# Altium PCB CAN_IB_V1.PcbDoc
Units mm, origin at the board's own origin, x right, y up, seen from the top; angles counter-clockwise.
Board outline 38.5 x 38.25 mm, 2 copper layers (Top Layer, Bottom Layer); 31 components, 50 nets, 183 pads, 22 vias.
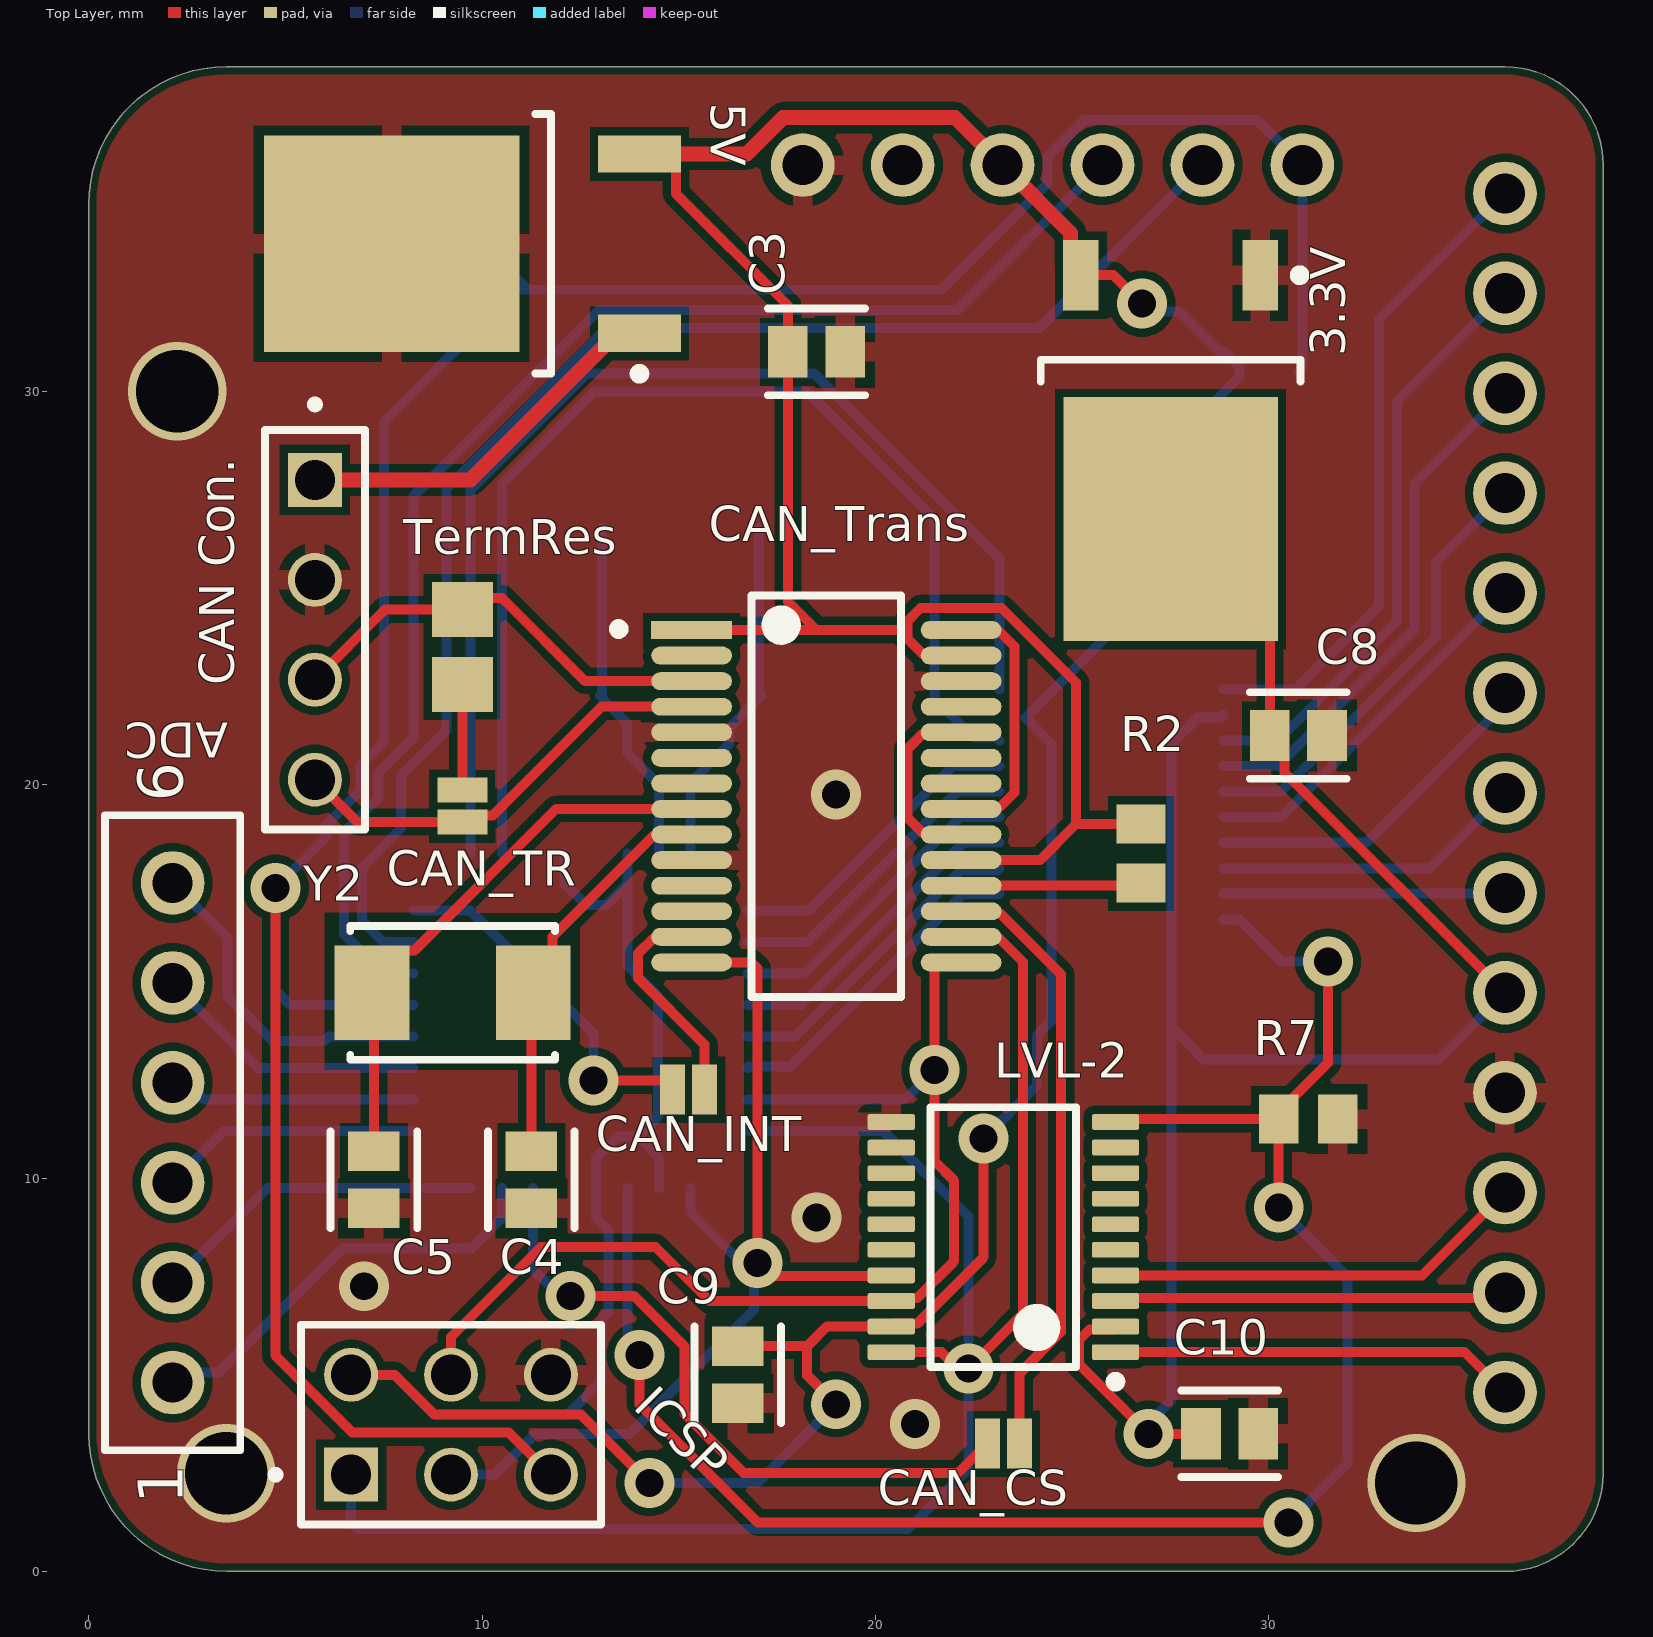
[diagram p0: Top Layer view]
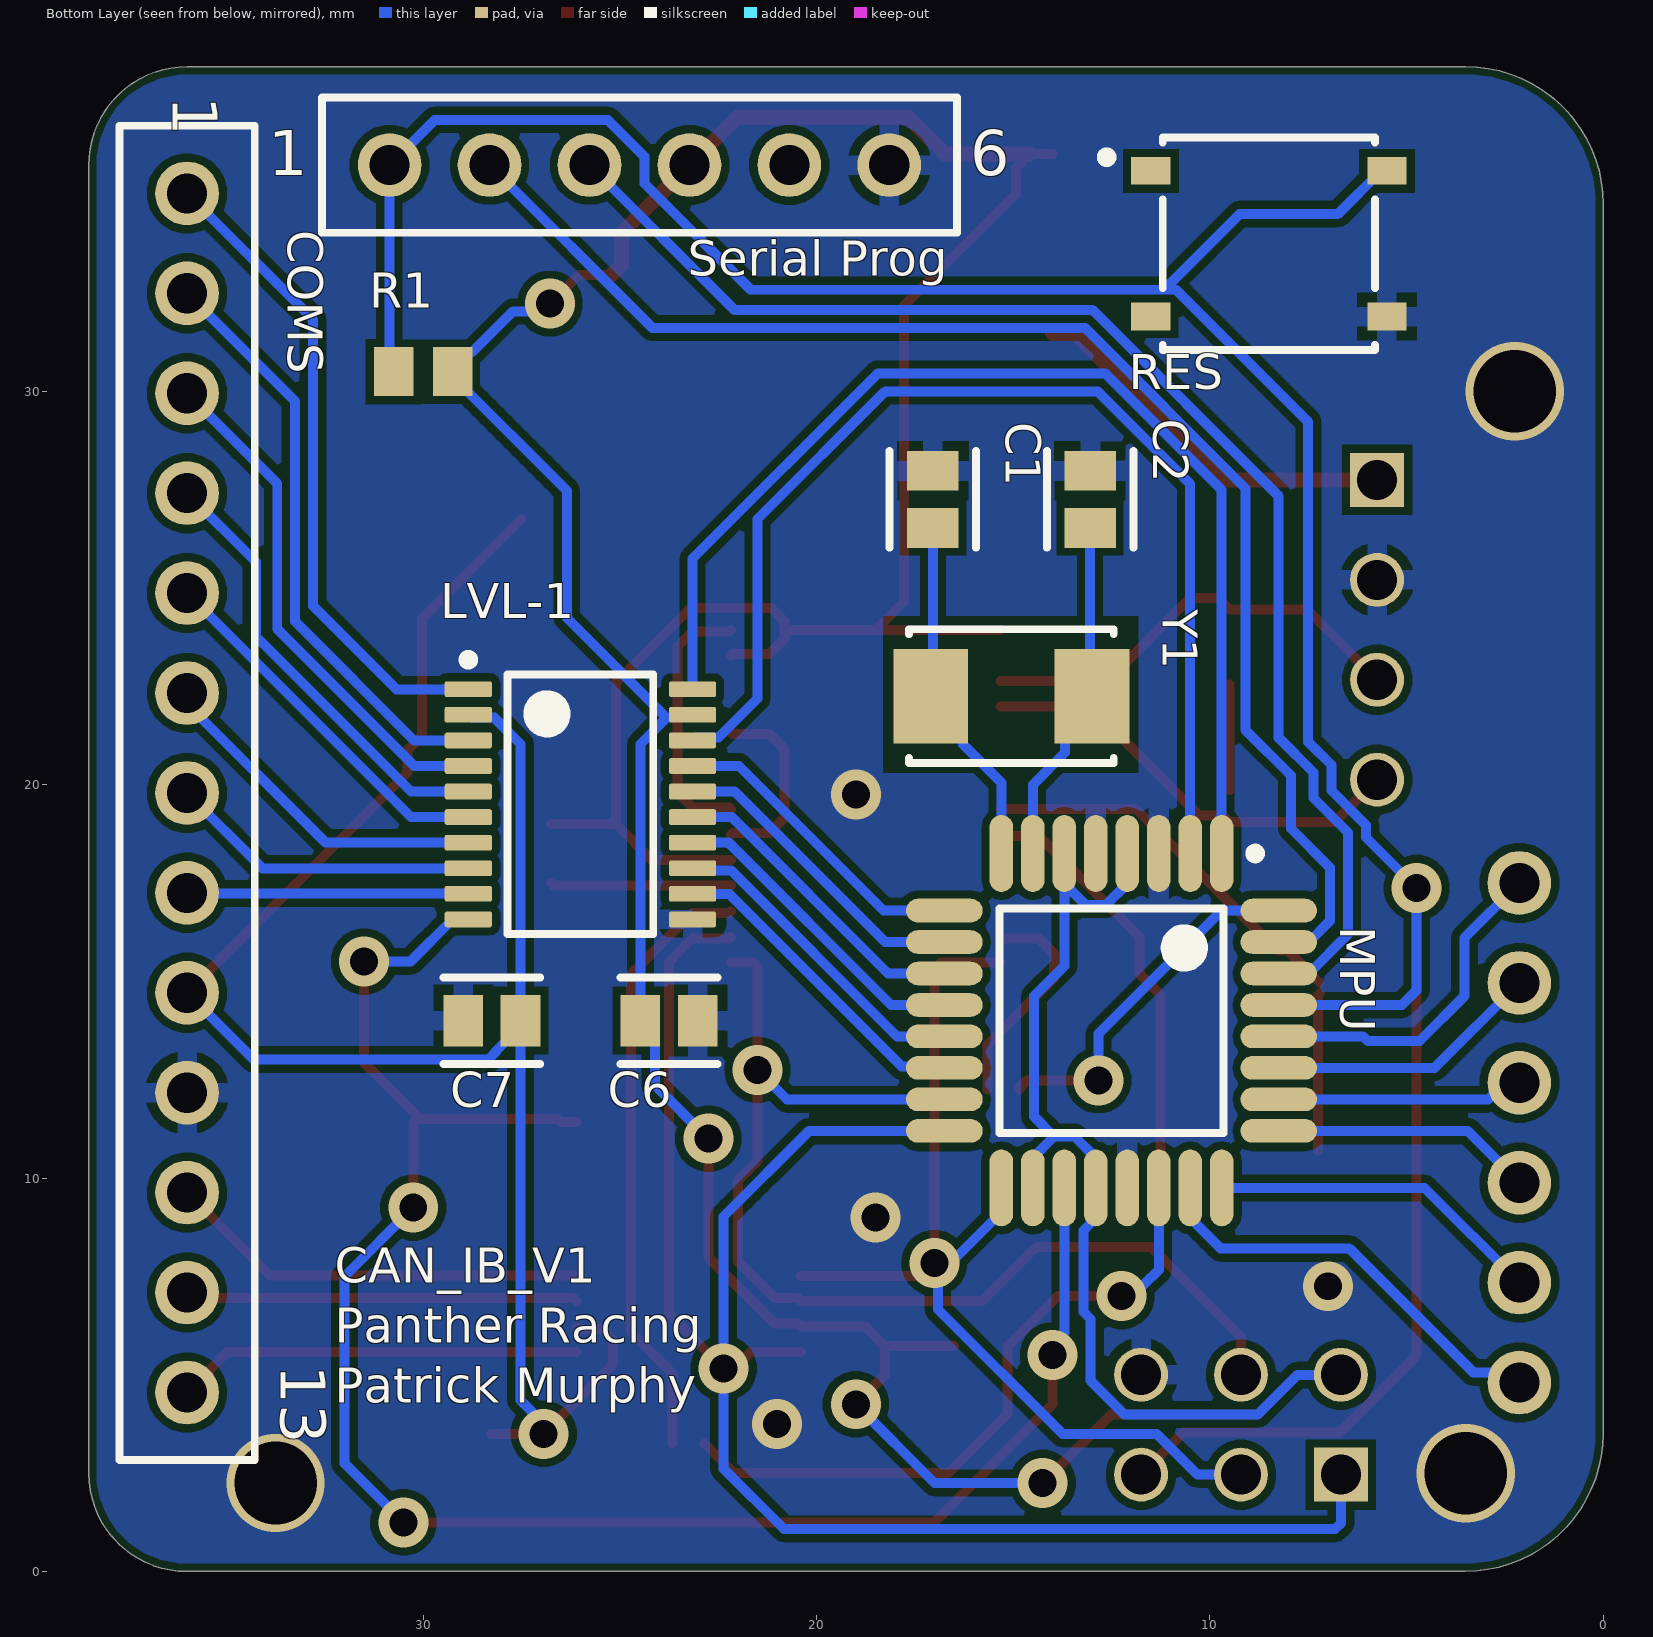
[diagram p1: Bottom Layer view, seen from below]
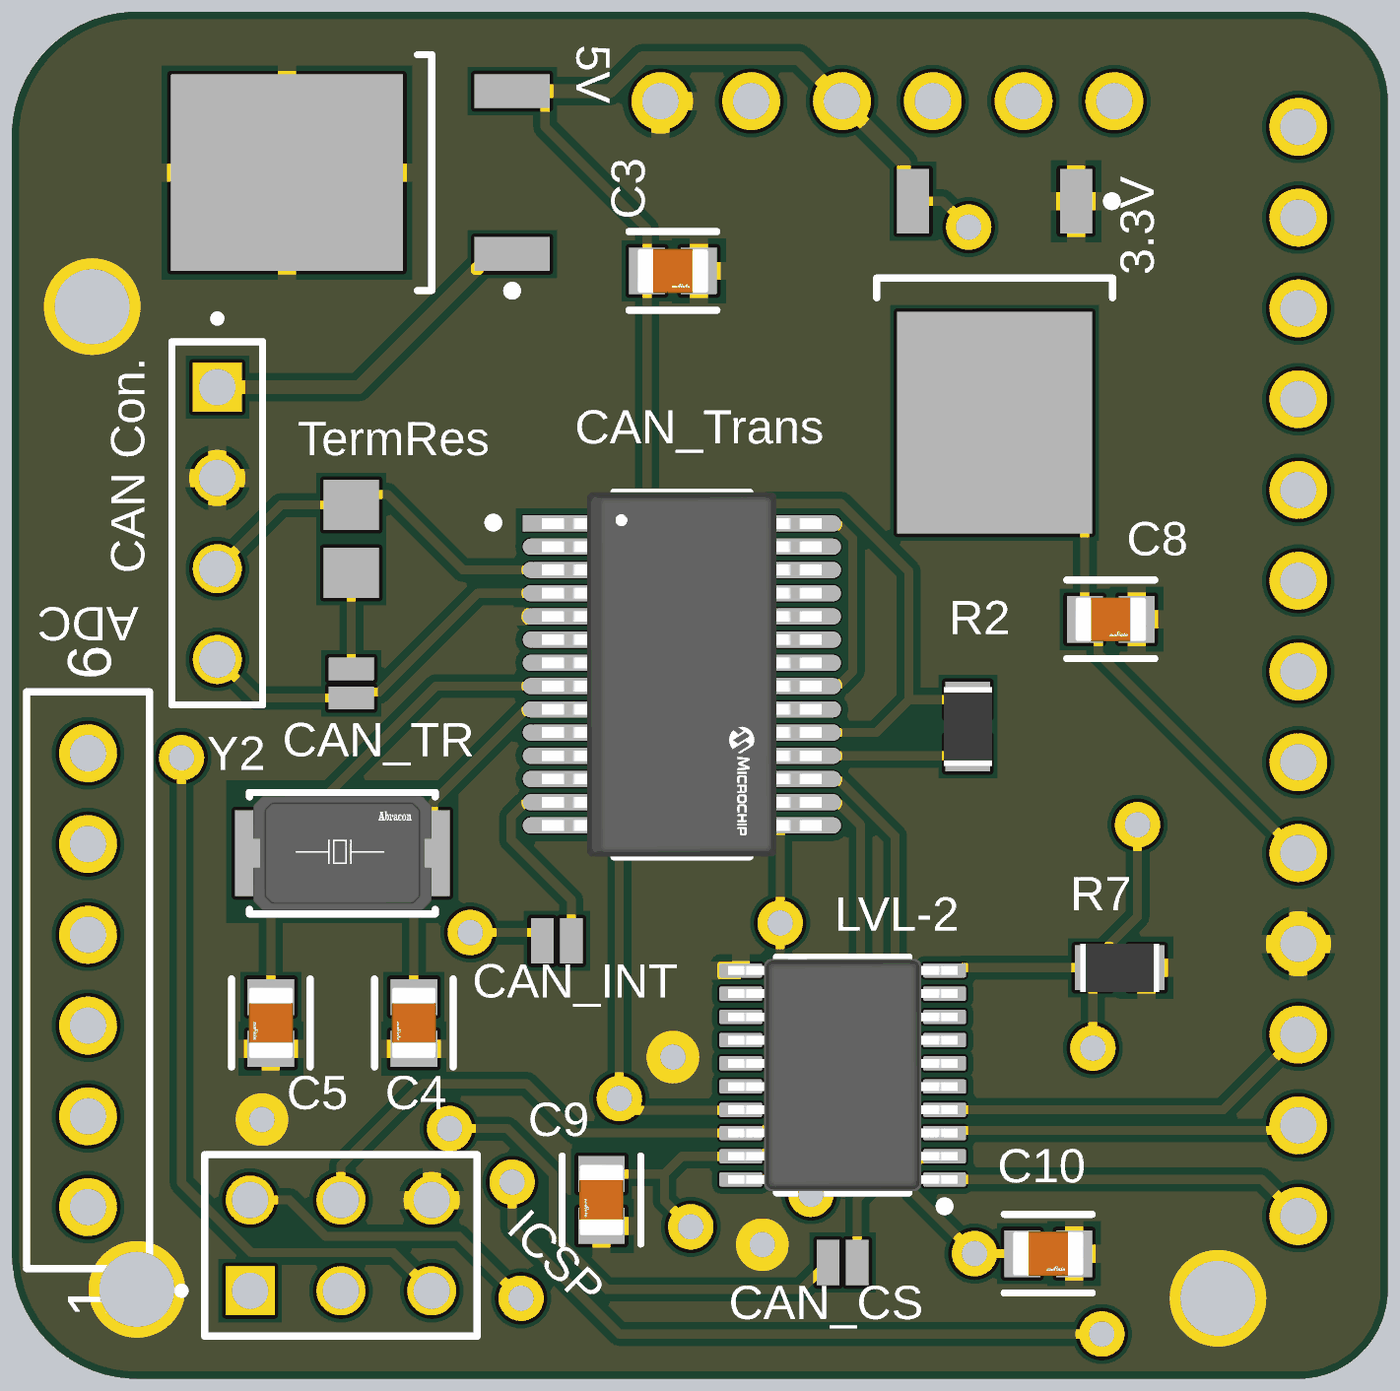
[diagram p2: 3D render of the assembled board from above, using the file's embedded part models]
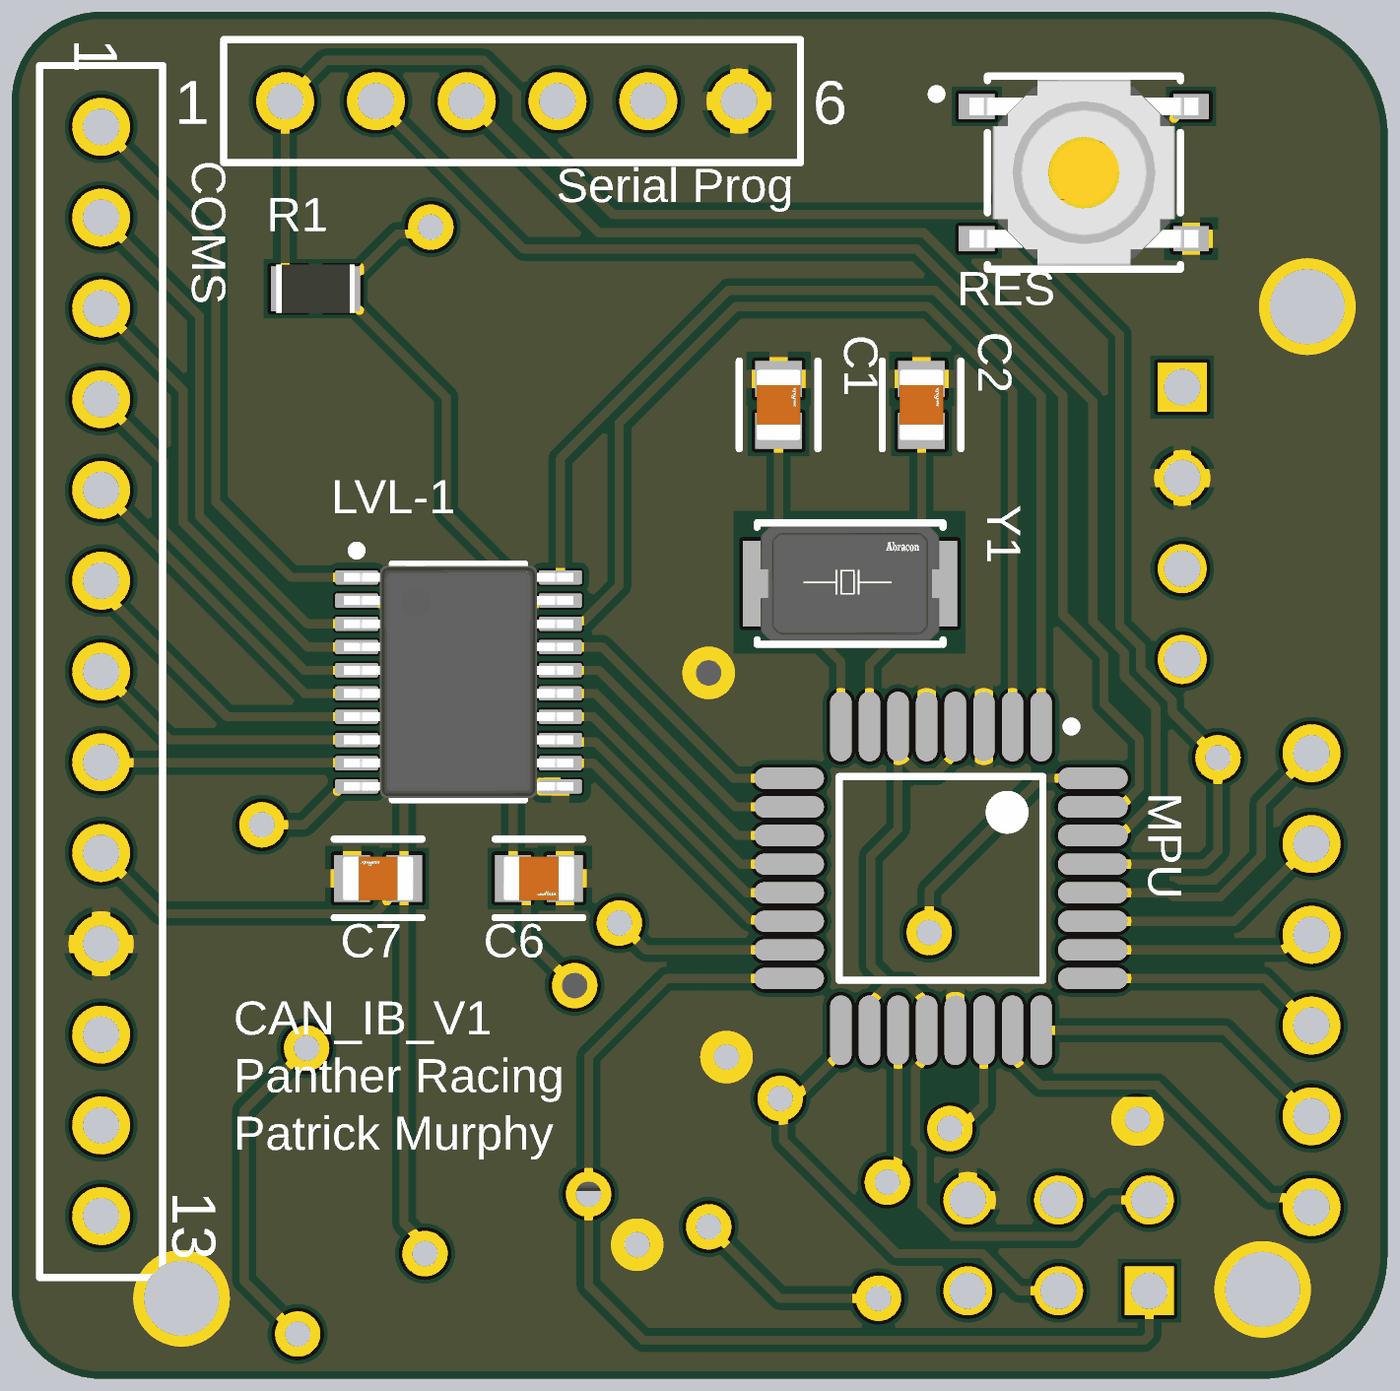
[diagram p3: 3D render of the assembled board from below, using the file's embedded part models]

## Layer stack, top to bottom
Top Solder: solder mask 0.0102, Solder Resist, Dk 3.5
Top Layer: signal copper 0.0356
Dielectric 1: dielectric 0.32, FR-4, Dk 4.8
Bottom Layer: signal copper 0.0356
Bottom Solder: solder mask 0.0102, Solder Resist, Dk 3.5

## Board outline
0.007,3.503 0.007,34.75 0,34.75 cw(c3.5,34.75) 3.5,38.25 36,38.25 cw(c36,35.75) 38.5,35.75 38.5,2.5 cw(c36,2.5) 36,0 3.507,0 3.507,0.003 cw(c3.507,3.503)

## Design rules (kind name [scope] priority, off if disabled: settings)
BoardOutlineClearance [All] p1: gap=0.2 ignorepadtopadclearanceinfootprint=FALSE except(0.4: Arc-SplitBarrior Arc-SplitContinuation Track-SplitBarrior Track-SplitContinuation SMDPad-SplitBarrior SMDPad-SplitContinuation THPad-SplitBarrior THPad-SplitContinuation Via-SplitBarrior Via-SplitContinuation Fill-SplitBarrior Fill-SplitContinuation Poly-SplitBarrior Poly-SplitContinuation Region-SplitBarrior Region-SplitContinuation Text-SplitBarrior Text-SplitContinuation)
Clearance "Clearance Bottom Layer" [OnLayer('Bottom Layer')] p1: gap=0.203 ignorepadtopadclearanceinfootprint=TRUE except(0.254: Arc-Text Track-Text SMDPad-Text THPad-Text Via-Text Fill-Text Poly-Text Region-Text Text-Text)
Clearance "Clearance Top Layer" [OnLayer('Top Layer')] p2: gap=0.203 ignorepadtopadclearanceinfootprint=TRUE except(0.254: Arc-Text Track-Text SMDPad-Text THPad-Text Via-Text Fill-Text Poly-Text Region-Text Text-Text)
Clearance [All] p3: gap=0.2 ignorepadtopadclearanceinfootprint=FALSE except(0.089: Arc-Arc Arc-Track Arc-SMDPad Track-Track Track-SMDPad SMDPad-SMDPad; 0.127: Arc-Via Track-Via SMDPad-Via THPad-Via Via-Via; 0.254: Arc-Text Track-Text SMDPad-Text THPad-Text Via-Text Fill-Text Poly-Text Region-Text Text-Text)
HoleSize [All] p1: absolutevalues=TRUE maxlimit=6.3 minlimit=0.2 maxpercent=80.000 minpercent=20.000
MinimumAnnularRing [All] p1: minimumring=0.076
MinimumSolderMaskSliver [All] p1: minsoldermaskwidth=0.1
PolygonConnect PolygonConnect_1 [All] p1: thpad.connectstyle=Relief thpad.reliefconductorwidth=0.508 thpad.reliefentries=4 thpad.polygonreliefangle="90 Angle" thpad.airgapwidth=0.254 smdpad.connectstyle=Relief smdpad.reliefconductorwidth=0.508 smdpad.reliefentries=4 smdpad.polygonreliefangle="90 Angle" smdpad.airgapwidth=0.254 via.connectstyle=Direct via.reliefconductorwidth=0.508 via.reliefentries=4 via.polygonreliefangle="90 Angle" via.airgapwidth=0.254
RoomDefinition CAN_IB_V1 [InComponentClass('CAN_IB_V1')] p1: confinementstyle=ConfineIn formatcopy=TRUE lockcomponents=FALSE outline 0,38.25 38.25,38.25 38.25,0 0,0
RoutingCorners [All] p1: cornerstyle=Round minsetback=2.54 maxsetback=2.54
RoutingVias [All] p1: holewidth=0.5 width=1 viastyle="Through Hole" minholewidth=0.2 minwidth=0.45 maxholewidth=1 maxwidth=2
SilkToSilkClearance [All] p1: silktosilkclearance=0.1
SilkToSolderMaskClearance [IsPad] p1: minsilkscreentomaskgap=0.1 clearancetoexposedcopper=TRUE
SolderMaskExpansion [All] p1: expansion=0.102 istentingtop=FALSE
Width [All] p1: maxlimit=2.54 minlimit=0.089 preferedwidth=0.254
25 further rules are at their usual default settings.

## Components (designator, comment, footprint, x,y, rotation, side; value= is the part's Value field where it differs from the comment)
3.3V "LD1117ADT33TR" TO-252_L 27.5,28.75 r270 top
5V "L7805CDT-TR" TO-252_N 9.75,33.75 r180 top
ADC "SAMTEC-TSW-106-07-X-SJ" SAMTEC-TSW-106-07-X-S 2.133,11.152 r90 top
C1 "22pf" FP-GRM21B-0_15-IPC_C#1 17.044,27.25 r90 bottom
C2 "22pf" FP-GRM21B-0_15-IPC_C#1 13.044,27.25 r90 bottom
C3 ".1uf" FP-GRM21B-0_15-IPC_C#1 18.5,31 r0 top
C4 "27pf" FP-GRM21B-0_15-IPC_C#2 11.25,9.956 r270 top
C5 "27pf" FP-GRM21B-0_15-IPC_C#2 7.25,9.956 r270 top
C6 ".1uf" FP-GRM21B-0_15-IPC_C#3 23.75,14 r180 bottom
C7 ".1uf" FP-GRM21B-0_15-IPC_C#2 28.25,14 r0 bottom
C8 ".1uf" FP-GRM21B-0_15-IPC_C#1 30.75,21.25 r0 top
C9 ".1uf" FP-GRM21B-0_15-IPC_C#1 16.5,5 r270 top
C10 ".1uf" FP-GRM21B-0_15-IPC_C#1 29,3.5 r0 top
"CAN Con." "TSW-104-07-F-S" SAMTEC_TSW-104-07-F-S 5.75,23.936 r270 top
CAN_CS "" SMT-JUMPER_2_NO_SILK 23.25,3.25 r0 top
CAN_INT "" SMT-JUMPER_2_NO_SILK 15.25,12.25 r0 top
CAN_TR "" SMT-JUMPER_2_NO_SILK 9.5,19.456 r90 top
CAN_Trans "MCP25625T-E/SS" FP-C04-073-IPC_B 18.75,19.706 r0 top
COMS "SAMTEC-TSW-113-07-X-SJ" SAMTEC-TSW-113-07-X-S 36,19.79 r270 bottom
ICSP "TSW-103-07-F-D" SAMTEC_TSW-103-07-F-D 9.21,3.73 r0 top
LVL-1 "TXB0108PWR" PW0020A_L 26,19.5 r180 bottom
LVL-2 "TXB0108PWR" PW0020A_L 23.25,8.5 r180 top
MPU "ATmega328P-AU" 32A_M 12.5,14 r270 bottom
R1 "ERA-6AEB103V" RESC2013X60X40LL20T25_A 30,30.5 r180 bottom
R2 "ERA-6AEB103V" RESC2013X60X40LL20T25_A 26.75,18.25 r90 top
R7 "ERA-6AEB103V" RESC2013X60X40LL20T25_A 31,11.5 r0 top
RES "PTS526SK15SMTR2LFS" FP-PTS526SK15SMTR2LFS-MFG 8.5,33.75 r180 bottom
"Serial Prog" "SAMTEC-TSW-106-07-X-SJ" SAMTEC-TSW-106-07-X-S 24.5,35.75 r180 bottom
TermRes "ERA6AEB121V" RESC2013X60X40ML20T25 9.5,23.5 r270 top
Y1 "ABM3-16.000MHZ-D2Y-T" FP-ABM3-MFG#1 15.044,22.25 r180 bottom
Y2 "ABM3-8.000MHZ-D2Y-T" FP-ABM3-MFG#2 9.25,14.706 r0 top

## Footprints (in the part's own frame and the unit in brackets; to place one, negate y for a bottom-side part, rotate by r counter-clockwise, add the part's x,y. Pads: shape width x height; smd on the part's side, far side on the other; paste and mask are expansions set on the pad)
32A_M [mm] "Thin QFP, 32-Leads, Body 7x7mm, Pitch 0.8mm, IPC Low Density"
  oval 1.95x0.6 smd: 1(-4.25,2.8) 2(-4.25,2) 3(-4.25,1.2) 4(-4.25,0.4) 5(-4.25,-0.4) 6(-4.25,-1.2) 7(-4.25,-2) 8(-4.25,-2.8) 17(4.25,-2.8) 18(4.25,-2) 19(4.25,-1.2) 20(4.25,-0.4) 21(4.25,0.4) 22(4.25,1.2) 23(4.25,2) 24(4.25,2.8)
  oval 0.6x1.95 smd: 9(-2.8,-4.25) 10(-2,-4.25) 11(-1.2,-4.25) 12(-0.4,-4.25) 13(0.4,-4.25) 14(1.2,-4.25) 15(2,-4.25) 16(2.8,-4.25) 25(2.8,4.25) 26(2,4.25) 27(1.2,4.25) 28(0.4,4.25) 29(-0.4,4.25) 30(-1.2,4.25) 31(-2,4.25) 32(-2.8,4.25)
  silkscreen extent -4.37,-2.85 2.85,3.77, body extent -3.5,-3.5 3.5,3.5, height 1.2
FP-ABM3-MFG#1 [mm]
  rect 1.9x2.4 smd paste+0: 1(-2.05,0) 2(2.05,0)
  silkscreen extent -2.6,-1.7 2.6,1.7, body extent -2.5,-1.6 2.5,1.6, height 1.3
FP-ABM3-MFG#2 [mm]
  rect 1.9x2.4 smd: 1(-2.05,0) 2(2.05,0)
  silkscreen extent -2.6,-1.7 2.6,1.7, body extent -3.1,-1.8 3.1,1.8, height 0.25
FP-C04-073-IPC_B [mm]
  rect 2.053x0.455 smd paste+0 mask+0.038: 1(-3.425,4.225)
  rrect100% 2.053x0.455 smd paste+0 mask+0.038: 2(-3.425,3.575) 3(-3.425,2.925) 4(-3.425,2.275) 5(-3.425,1.625) 6(-3.425,0.975) 7(-3.425,0.325) 8(-3.425,-0.325) 9(-3.425,-0.975) 10(-3.425,-1.625) 11(-3.425,-2.275) 12(-3.425,-2.925) 13(-3.425,-3.575) 14(-3.425,-4.225) 15(3.425,-4.225) 16(3.425,-3.575) 17(3.425,-2.925) 18(3.425,-2.275) 19(3.425,-1.625) 20(3.425,-0.975) 21(3.425,-0.325) 22(3.425,0.325) 23(3.425,0.975) 24(3.425,1.625) 25(3.425,2.275) 26(3.425,2.925) 27(3.425,3.575) 28(3.425,4.225)
  silkscreen extent -5.4,-5.1 1.9,5.1, body extent -4.7,-5.35 4.7,5.35, height 0.25
FP-GRM21B-0_15-IPC_C#1 [mm]
  rect 1.006x1.308 smd paste+0: 1(-0.726,0) 2(0.726,0)
  silkscreen extent -1.23,-1.1 1.23,1.1, body extent -1,-0.63 1,0.63, height 1.4
FP-GRM21B-0_15-IPC_C#2 [mm]
  rect 1.006x1.308 smd: 1(-0.726,0) 2(0.726,0)
  silkscreen extent -1.23,-1.1 1.23,1.1, body extent -1.33,-0.8 1.33,0.8, height 0.25
FP-GRM21B-0_15-IPC_C#3 [mm]
  rect 1.006x1.308 smd: 1(-0.726,0)
  rect 1.006x1.308 smd paste+0: 2(0.726,0)
  silkscreen extent -1.23,-1.1 1.23,1.1, body extent -1,-0.63 1,0.63, height 1.4
FP-PTS526SK15SMTR2LFS-MFG [mm]
  rect 1x0.7 smd: 1(-3,1.85) 2(3,1.85) 3(-3,-1.85) 4(3,-1.85)
  silkscreen extent -4.25,-2.7 2.7,2.7, body extent -3.2,-2.6 3.2,2.6, height 1.65
PW0020A_L [mm] "SOP, 20-Leads, Body 6.6x4.5mm, Pitch 0.65mm, IPC High Density"
  rrect25% 1.2x0.4 smd mask+0.06: 1(-2.85,2.925) 2(-2.85,2.275) 3(-2.85,1.625) 4(-2.85,0.975) 5(-2.85,0.325) 6(-2.85,-0.325) 7(-2.85,-0.975) 8(-2.85,-1.625) 9(-2.85,-2.275) 10(-2.85,-2.925) 11(2.85,-2.925) 12(2.85,-2.275) 13(2.85,-1.625) 14(2.85,-0.975) 15(2.85,-0.325) 16(2.85,0.325) 17(2.85,0.975) 18(2.85,1.625) 19(2.85,2.275) 20(2.85,2.925)
  silkscreen extent -2.98,-3.3 1.85,3.8, body extent -3.21,-3.25 3.21,3.25, height 1
RESC2013X60X40LL20T25_A [mm] "Chip Resistor, 2-Leads, Body 2.20x1.35mm, IPC High Density"
  rect 1x1.25 smd: 1(-0.75,0) 2(0.75,0)
  body extent -1.1,-0.67 1.1,0.67, height 0.6
RESC2013X60X40ML20T25 [mm] "Chip Resistor, 2-Leads, Body 2.00x1.25mm, IPC Low Density"
  rect 1.4x1.55 smd: 1(-0.95,0) 2(0.95,0)
  body extent -1.1,-0.72 1.1,0.72, height 0.6
SAMTEC-TSW-106-07-X-S [mm]
  round 1.62 hole 1.02: 1(-6.35,0) 2(-3.81,0) 3(-1.27,0) 4(1.27,0) 5(3.81,0) 6(6.35,0)
  silkscreen extent -8.07,-1.72 8.07,1.72
SAMTEC-TSW-113-07-X-S [mm]
  round 1.62 hole 1.02: 1(-15.24,0) 2(-12.7,0) 3(-10.16,0) 4(-7.62,0) 5(-5.08,0) 6(-2.54,0) 7(0,0) 8(2.54,0) 9(5.08,0) 10(7.62,0) 11(10.16,0) 12(12.7,0) 13(15.24,0)
  silkscreen extent -16.96,-1.72 16.96,1.72
SAMTEC_TSW-103-07-F-D [mm]
  rect 1.37x1.37 hole 1.02: 01(-2.54,-1.27)
  round 1.37 hole 1.02: 02(-2.54,1.27) 03(0,-1.27) 04(0,1.27) 05(2.54,-1.27) 06(2.54,1.27)
  silkscreen extent -4.56,-2.54 3.81,2.54
SAMTEC_TSW-104-07-F-S [mm]
  rect 1.37x1.37 hole 1.02: 01(-3.81,0)
  round 1.37 hole 1.02: 02(-1.27,0) 03(1.27,0) 04(3.81,0)
  silkscreen extent -5.83,-1.27 5.08,1.27
SMT-JUMPER_2_NO_SILK [mil]
  rect 25x50 smd paste+0: 1(-16,0) 2(16,0)
TO-252_L [mm] "D-PAK, 4-Leads, Body 6.1x6.5mm, Pitch 2.28mm, Lead Span 9.7mm, IPC High Density"
  rect 1.8x0.9 smd: 1(-4.2,2.28) 3(-4.2,-2.28)
  rect 6.2x5.45 smd: 4(2,0)
  silkscreen extent -4.32,-3.3 -1.5,3.4, body extent -2.05,-3.3 4.15,3.3, height 2.4
TO-252_N [mm] "D-PAK, 4-Leads, Body 6.1x6.5mm, Pitch 2.28mm, Lead Span 9.7mm, IPC Medium Density"
  rect 2.1x0.95 smd: 1(-4.25,2.28) 3(-4.25,-2.28)
  rect 6.5x5.5 smd: 4(2.05,0)
  silkscreen extent -4.38,-3.3 -1.6,3.43, body extent -2,-3.3 4.2,3.3, height 2.4

## Part data
3.3V: library part CMP-0244-00137-1, "1A, Low Drop Positive Voltage Regulator, 3.3V, 3-Pin DPAK, Tape and Reel", ComponentLink1Description="Manufacturer URL", ComponentLink1URL=http://www.st.com, ComponentLink2Description=Datasheet, ComponentLink2URL=http://www.st.com/internet/com/TECHNICAL_RESOURCES/TECHNICAL_LITERATURE/DATASHEET/CD00002116.pdf, DatasheetVersion=2/12/2011, PackageDescription="3-Pin Transistor Outline Package 2.28 mm Pitch, 9.7 mm Lead Span (DPAK)", PackageReference=TO-252, PackageVersion=2011
5V: library part CMP-0244-00216-1, "Positive Voltage Regulator, 3-Pin DPAK, Tape and Reel", ComponentLink1Description="Manufacturer URL", ComponentLink1URL=http://www.st.com, ComponentLink2Description=Datasheet, ComponentLink2URL=http://www.st.com/internet/com/TECHNICAL_RESOURCES/TECHNICAL_LITERATURE/DATASHEET/CD00000444.pdf, DatasheetVersion=16/11/2011, PackageDescription="3-Pin Transistor Outline Package 2.28 mm Pitch, 9.7 mm Lead Span (DPAK)", PackageReference=TO-252, PackageVersion=2011
C1 C2 C3 C4 C5 C6 C7 C8 C9 C10: library part CMP-2007-03541-2, "Chip Multilayer Ceramic Capacitors for General Purpose, 0805, 10uF, X5R, 15%, 10%, 25V", Capacitance=10uF, Case Code (Imperial)=0805, Case Code (Metric)=2012, Dielectric=X5R, Max Operating Temperature=85°C, Min Operating Temperature=-55°C, Package Quantity=1, Tolerance=10%, Voltage=25V, Case/Package=0805, Depth=1.25mm, Height=1.25mm, Lead Free="Lead Free", Length=2mm, Material=Ceramic, Mount="Surface Mount", Packaging="Tape and Reel", Radiation Hardening=No, Termination=SMD/SMT, Thickness=0.053inch, Voltage Rating=25V, Voltage Rating (DC)=25V, Width=0.049inch
"CAN Con." ICSP: Package=None, Availability=Unavailable, MF=Samtec, Price=None
  "CAN Con.": MP=TSW-104-07-F-S
  ICSP: MP=TSW-103-07-F-D
CAN_CS CAN_INT CAN_TR: library part JUMPER-SMT_2_NO_SILK, Package=SMT-JUMPER_2_NO_SILK, DeviceName=_SILK, DeviceSetName=JUMPER-SMT_2_NO, GateName_1=G$1, LibraryName=SparkFun-Jumpers, SymbolName_1=SMT-JUMPER_2_NO
CAN_Trans: library part CMP-06279-000016-1, "IC TRANSCEIVER 1/1 28SSOP", Case/Package=SSOP, Max Operating Temperature=125°C, Max Supply Voltage=5.5V, Min Operating Temperature=-40°C, Min Supply Voltage=4.5V, Operating Supply Current=70mA, Package Quantity=2100, Data Rate=1Mbps, Interface=SPI, Mount="Surface Mount", Number of Drivers=1, Number of Pins=28, Number of Receivers=1, Number of Transceivers=1, Packaging="Tape and Reel", Propagation Delay=125ns, Receiver Hysteresis=200mV, RoHS Compliant=Yes, Weight=0.080001oz
LVL-1 LVL-2: library part CMP-2000-07337-1, "TXB0108 8-Bit Bidirectional Voltage-Level Translator with Auto-Direction Sensing and / +/- 15-kV ESD Protection, 1.2 to 3.6 V, -40 to 85 degC, 20-Pin TSSOP (PW), Green (RoHS & no Sb/Br), Tape and Reel", Manufacturer="Texas Instruments", Operating Temperature=-40°C~85°C, Package / Case="20-TSSOP(0.173\",4.40mmWidth)", Package Description="20-Pin Small Outline Package Integrated Circuit, Body 6.5 x 4.4 mm, Pitch 0.65 mm", Package Reference=PW20, Package Version="4040064-5/G, 02/2011", Standard Package=1, Supplier Device Package=20-TSSOP, Voltage - Supply=1.2V~3.6V,1.65V~5.5V, Category=IntegratedCircuits(ICs), Data Rate=100Mbps, Datasheet URL=http://www.ti.com/general/docs/lit/getliterature.tsp?genericPartNumber=TXB0108&fileType=pdf, Datasheet Version="Rev. F, 12/2014", Differential - Input=Output:No/No, Dynamic Catalog=TXBSeries, Family=Logic-Translators, Input Type=Logic, Logic Function=Translator,Bidirectional, Manufacturer URL=http://www.ti.com/, Mounting Technology=SurfaceMount, Number of Bits=8, Number of Channels=8, Number of Outputs/Channel=1, Other Names=296-21527-6, Output Type=Logic, Package URL=http://www.ti.com/litv/pdf/mpds362, Packaging=Digi-Reel®, Product Training Modules=VoltageLevelTranslation, Propagation Delay (Max)=4ns, Series=-
MPU: library part CMP-0095-00269-2, "8-bit AVR Microcontroller, 32KB Flash, 1KB EEPROM, 2KB SRAM, 32-pin TQFP, Industrial Grade (-40°C to 85°C)", Code_JEDEC=MS-026-ABA, ComponentLink1Description="Manufacturer URL", ComponentLink1URL=http://www.atmel.com/, ComponentLink2Description="ATmega48A/48PA/88A/88PA/168A/168PA/328/328P Datasheet", ComponentLink2URL=http://www.atmel.com/dyn/resources/prod_documents/doc8271.pdf, ComponentLink3Description="ATmega48A/48PA/88A/88PA/168A/168PA/328/328P Summary", ComponentLink3URL=http://www.atmel.com/dyn/resources/prod_documents/8271S.pdf, DatasheetVersion="revD, May-2011", PackageDescription="32-Lead, 7x7x1.0 mm Body, 0.8mm Lead Pitch, Thin Profile Plastic Quad Flat Package (TQFP)", PackageReference=32A, PackageVersion="revC, Oct-2010", RevisionNote="DatasheetVersion & PackageVersion updated. URLs added."
R1 R2 R7: library part CMP-2001-00582-2, "Metal Film Chip Resistor, High Reliability Type, 0.125 W, +/- 0.1%, -55 to 155 degC, 0805 (2012 Metric), RoHS, Tape and Reel", Case Code - in=0805, Case Code - mm=2012, Manufacturer=Panasonic, Operating Temperature Range=-55Cto+155C, Package / Case=0805(2012metric), Package Description="2-Pin Surface Mount Device, Body 2 x 1.25 mm", Power Rating=125mW(1/8W), Resistance=10kOhms, Temperature Coefficient=25PPM/C, Tolerance=0.1%, Voltage Rating=100V, Brand=Panasonic, Datasheet URL=https://industrial.panasonic.com/cdbs/www-data/pdf/RDM0000/AOA0000C307.pdf, Datasheet Version=02/2016, Factory Pack Quantity=5000, Height=0.5mm, Length=2mm, Manufacturer URL=http://www.panasonic.com/, Mounting Technology=SurfaceMount, Package Reference=0805, Packaging=Reel, Product=ThinFilmResistorsSMD, Product Category=ThinFilmResistors-SMD, RoHS=Details, Series=ERA-6A, Termination Style=SMD/SMT, Type=MetalFilmChipResistors, Width=1.25mm
RES: library part CMP-10040-000013-1, "TACT 5.2 X 5.2, 1.5 MM H, 260GF,", Contact Current Rating=50mA, Contact Resistance=100mΩ, Manufacturer=C&K, Operating Force=250gf, Temperature="-20°C to +70°C", Temperature Range High=+70°C, Temperature Range Low=-20°C, Voltage Rating Dc=12V, Automotive=No, Category=Switch, ComponentLink2Description=Datasheet, ComponentLink2URL=https://www.ckswitches.com/media/2780/pts526.pdf, Device Class L1=Electromechanical, Device Class L2=Switches, Device Class L3="Tactile Switches", Digikey Description="TACT 5.2 X 5.2, 1.5 MM H, 260GF,", Electromechanical Life=200000Cycles, Height=1.65mm, Lead Free=Yes, Manufacturer Part Number=PTS526SK15SMTR2LFS, Octopart=https://octopart.com/pts526+sk15+smtr2+lfs-c%26k+components-100617999, Package=PTS526SK15SMTR2LFS, RoHS=TRUE, Standoff Height=0mm, Throw Configuration=SPST-NO
TermRes: library part CMP-2001-00588-1, Manufacturer=Panasonic, Part Number=ERA6AEB121V
Y1: library part CMP-27762-004490-1, "Crystal 16MHz ±20ppm 18pF SMD-2 5mm x 3.2mm", Case/Package=SMD/SMT, ESR (Equivalent Series Resistance)=40R, Frequency=16MHz, Frequency Stability=30ppm, Frequency Tolerance=20ppm, Load Capacitance=18pF, Max Operating Temperature=85°C, Min Operating Temperature=-40°C, Operating Frequency="16 MHz", Package Quantity=1000, Resistor Type=Ceramic, Height=0.051inch, Lead Free="Lead Free", Length=0.197inch, Mount="Surface Mount", Number of Pins=2, Packaging="Tape and Reel", RoHS Compliant=Yes, Series=ABM3, Series Resistance=40R, Termination=SMD/SMT, Tolerance=20ppm, Width=0.126inch
Y2: library part CMP-2000-05033-2, "Crystal 8MHz ±20ppm 18pF SMD-2 5mm x 3.2mm", Case/Package=CSMD, ESR (Equivalent Series Resistance)=140R, Frequency=8MHz, Frequency Stability=30ppm, Frequency Tolerance=20ppm, Load Capacitance=18pF, Max Operating Temperature=85°C, Min Operating Temperature=-40°C, Package Quantity=1000, Resistor Type=Ceramic, Series Resistance=500R, Depth=3.2mm, Height=0.051inch, Lead Free="Lead Free", Length=5mm, Mount="Surface Mount", Number of Pins=2, Packaging="Tape and Reel", Radiation Hardening=No, RoHS Compliant=Yes, Termination=SMD/SMT, Tolerance=20ppm, Width=3.2mm

## Via types
v1: diameter 1.27, hole 0.711, Top Layer to Bottom Layer, 19 vias
v2: diameter 2.5, hole 2.1, Top Layer to Bottom Layer, 3 vias

## Nets (pads, with @x,y where several pads share a name; then routed paths per layer and width w, separated by ;. In a path a pad name is that pad's centre, name@x,y a point inside that pad or via, vN(x,y) a via of type N, cw(c..) or ccw(c..) an arc to the next point about the centre after c; other vN are vias at no path point)
3.3V: 3.3V.4 C7.1 C8.1 C10.1 COMS.9 LVL-1.2 LVL-2.2 | length 50
  Top Layer w0.254: LVL-2.2 26.027,6.152 25.439,6.152 25.17,5.882 25.17,5.268 v1(26.937,3.5) C10.1 ; 3.3V.4 30.024,24.226 C8.1 30.4,20.874 30.4,20.31 COMS.9
  Bottom Layer w0.254: v1(26.937,3.5) 26.937,3.764 27.524,4.35 C7.1@27.524,13.849 ; LVL-1.2 28.777,21.702 28.189,21.702 27.524,21.036 C7.1 C7.1@27.524,13.849 ; COMS.9 34.306,13.016 28.337,13.016 28.143,13.209 28.143,13.229 C7.1@27.524,13.849
ADC-0: ADC.1 MPU.23 | length 10.9
  Bottom Layer w0.254: ADC.1 2.395,5.063 3.306,5.063 6.458,8.215 9.731,8.215 10.5,8.984 MPU.23
ADC-1: ADC.2 MPU.24 | length 8.6
  Bottom Layer w0.254: ADC.2 4.542,9.75 MPU.24
ADC-2: ADC.3 MPU.25 | length 6.7
  Bottom Layer w0.254: ADC.3 3.452,11.2 MPU.25
ADC-3: ADC.4 MPU.26 | length 6.3
  Bottom Layer w0.254: ADC.4 2.503,12.422 2.925,12 MPU.26
ADC-4: ADC.5 MPU.27 | length 7
  Bottom Layer w0.254: ADC.5 4.295,12.8 MPU.27
ADC-5: ADC.6 MPU.28 | length 8.7
  Bottom Layer w0.254: ADC.6 3.534,16.101 3.534,14.622 4.673,13.483 5.986,13.483 6.103,13.6 MPU.28
CAN_CS: CAN_CS.2 CAN_Trans.17 | length 15.6
  Top Layer w0.254: CAN_Trans.17 22.214,16.743 23.151,16.743 24.715,15.179 24.715,6.084 23.656,5.025 CAN_CS.2
CAN_INT: CAN_INT.2 CAN_Trans.13 | length 5.7
  Top Layer w0.254: CAN_Trans.13 15.286,16.093 14.349,16.093 13.968,15.712 13.968,15.079 15.656,13.391 CAN_INT.2
CAN_MISO: CAN_Trans.16 ICSP.01 LVL-2.20 MPU.16 | length 45.4
  Top Layer w0.254: LVL-2.20 21.672,5.575 22.085,5.162 v1(22.36,5.162) 23.75,6.551 23.75,15.494 23.151,16.093 22.214,16.093 CAN_Trans.16
  Bottom Layer w0.254: ICSP.01 6.67,1.226 6.819,1.077 20.827,1.077 22.36,2.61 22.36,9.025 20.185,11.2 MPU.16
CAN_MOSI: CAN_Trans.15 ICSP.04 LVL-2.18 MPU.15 | length 29.2
  Top Layer w0.254: ICSP.04 9.21,5.96 11.5,8.25 14.41,8.25 15.785,6.875 LVL-2.18 20.473,6.948 21.061,6.948 22,7.887 22,9.931 21.5,10.431 v1(21.5,12.75) 21.502,12.752 21.502,15.388 21.594,15.481 CAN_Trans.15
  Bottom Layer w0.254: MPU.15 20.75,12 v1(21.5,12.75)
CAN_RX: CAN_Trans.21 CAN_Trans.28 | length 6.8
  Top Layer w0.254: CAN_Trans.21 22.214,19.419 23.151,19.419 23.532,19.8 23.532,23.512 23.151,23.893 22.214,23.893 CAN_Trans.28
CAN_SCK: CAN_Trans.14 ICSP.03 LVL-2.17 MPU.17 | length 26.7
  Top Layer w0.254: CAN_Trans.14 16.851,15.481 17,15.332 v1(17,7.84) 16.83,7.67 17,7.5 17.013,7.512 20.388,7.512 LVL-2.17
  Bottom Layer w0.254: ICSP.03 10.314,2.46 11.354,3.5 13.75,3.5 16.911,6.661 16.911,7.411 17,7.5 16.937,7.5 v1@16.799,7.639 ; MPU.17 15.3,9.138 v1@16.799,7.639 ; v1(17,7.84) v1@16.799,7.639
CAN_TX: CAN_Trans.20 CAN_Trans.24 | length 4.8
  Top Layer w0.254: CAN_Trans.20 22.137,18.769 21.199,18.769 20.818,19.15 20.818,20.912 21.199,21.293 22.137,21.293 CAN_Trans.24
CANH: "CAN Con..04" CAN_TR.1 CAN_Trans.4 | length 11.2
  Top Layer w0.254: 5.75,20.126 6.826,19.05 CAN_TR.1 9.665,19.215 10.272,19.215 13.038,21.981 CAN_Trans.4
CANL: "CAN Con..03" CAN_Trans.3 TermRes.1 | length 11.3
  Top Layer w0.254: 5.75,22.666 7.534,24.45 TermRes.1 9.793,24.743 10.507,24.743 12.619,22.631 CAN_Trans.3
CS-1: LVL-1.20 MPU.1 | length 29.2
  Bottom Layer w0.254: MPU.1 9.7,27.49 12.667,30.457 18.439,30.457 23.15,25.747 LVL-1.20
CS-2: LVL-1.18 MPU.2 | length 29.4
  Bottom Layer w0.254: MPU.2 10.5,27.643 12.857,30 18.25,30 21.5,26.75 21.5,22.187 22.489,21.198 23.077,21.198 LVL-1.18
CS-3: LVL-1.17 MPU.9 | length 7.9
  Bottom Layer w0.254: MPU.9 18.293,16.8 21.968,20.475 LVL-1.17
CS-4: LVL-1.16 MPU.10 | length 8
  Bottom Layer w0.254: MPU.10 18.255,16 22.08,19.825 LVL-1.16
CS-5: LVL-1.15 MPU.11 | length 8
  Bottom Layer w0.254: MPU.11 18.18,15.2 22.155,19.175 LVL-1.15
CS-6: LVL-1.14 MPU.12 | length 8.1
  Bottom Layer w0.254: MPU.12 18.106,14.4 22.231,18.525 LVL-1.14
CS-7: LVL-1.13 MPU.13 | length 8.2
  Bottom Layer w0.254: MPU.13 17.953,13.6 22.169,17.816 23.091,17.816 LVL-1.13
CS-8: LVL-1.12 MPU.14 | length 8.2
  Bottom Layer w0.254: MPU.14 16.79,12.84 17.84,12.84 22.225,17.225 LVL-1.12
CS-9: CAN_CS.1 MPU.22 | length 17.1
  Top Layer w0.254: v1(12.25,7) 13.865,7 15.15,5.715 15.15,4 16.65,2.5 22.094,2.5 CAN_CS.1
  Bottom Layer w0.254: MPU.22 11.3,7.666 11.48,7.487 11.488,7.487 11.975,7 v1(12.25,7)
D2: CAN_INT.1 MPU.32 | length 9.2
  Top Layer w0.254: v1(12.829,12.485) 14.653,12.485 14.844,12.295 CAN_INT.1
  Bottom Layer w0.254: MPU.32 9.7,16.8 12.829,13.671 v1(12.829,12.485)
GND: 3.3V.1 5V.4 "CAN Con..02" "Serial Prog.6" C1.2 C2.2 C3.2 C4.2 C5.2 C6.2 C7.2 C8.2 C9.2 C10.2 CAN_Trans.5 CAN_Trans.10 CAN_Trans.26 COMS.10 ICSP.06 LVL-1.11 LVL-2.11 MPU.3 MPU.5 MPU.21 R7.2 RES.4
  other v1: 21,3.75 7,7.25 18.5,9 19,19.75
  other v2: 33.75,2.25 3.5,2.5 2.25,30
L-CS-1: COMS.1 LVL-1.1 | length 16.6
  Bottom Layer w0.254: LVL-1.1 30.675,22.425 32.793,24.543 32.793,31.823 COMS.1
L-CS-2: COMS.2 LVL-1.3 | length 15.1
  Bottom Layer w0.254: LVL-1.3 30.228,21.125 33.25,24.147 33.25,29.74 COMS.2
L-CS-3: COMS.3 LVL-1.4 | length 13.2
  Bottom Layer w0.254: LVL-1.4 30.225,20.475 33.707,23.957 33.707,27.657 COMS.3
L-CS-4: COMS.4 LVL-1.5 | length 11.4
  Bottom Layer w0.254: LVL-1.5 30.308,19.825 34.25,23.767 34.25,25.66 COMS.4
L-CS-5: COMS.5 LVL-1.6 | length 9.5
  Bottom Layer w0.254: LVL-1.6 30.305,19.175 COMS.5
L-CS-6: COMS.6 LVL-1.7 | length 8.9
  Bottom Layer w0.254: LVL-1.7 32.475,18.525 36,22.05 COMS.6
L-CS-7: COMS.7 LVL-1.8 | length 7.9
  Bottom Layer w0.254: LVL-1.8 34.085,17.875 COMS.7
L-CS-8: COMS.8 LVL-1.9 | length 7.2
  Bottom Layer w0.254: LVL-1.9 28.863,17.237 35.988,17.237 COMS.8
L-MISO: COMS.13 LVL-2.1 | length 10.3
  Top Layer w0.254: LVL-2.1 34.975,5.575 COMS.13
L-MOSI: COMS.12 LVL-2.3 | length 10
  Top Layer w0.254: LVL-2.3 26.173,6.948 35.858,6.948 COMS.12
L-SCK: COMS.11 LVL-2.4 | length 10.8
  Top Layer w0.254: LVL-2.4 33.895,7.525 COMS.11
LVL-Drive: LVL-1.10 LVL-2.10 MPU.19 R7.1 | length 46.7
  Top Layer w0.254: v1(14,5.5) 14,4.25 17,1.25 v1(30.5,1.25) ; LVL-2.10 26.5,11.425 26.575,11.5 R7.1@30.149,11.5 ; v1(30.25,9.25) 30.25,11.399 R7.1@30.149,11.5 ; v1(31.5,15.5) 31.5,12.93 30.149,11.579 R7.1@30.149,11.5
  Bottom Layer w0.254: MPU.19 13.7,6.075 14,5.775 v1(14,5.5) ; LVL-1.10 29.25,16.575 30.325,15.5 v1(31.5,15.5) ; v1(30.25,9.25) 32,7.5 32,2.75 v1(30.5,1.25)
NetC1_1: C1.1 MPU.8 Y1.1 | length 9
  Bottom Layer w0.254: MPU.8 15.3,20.05 16.271,21.021 16.271,21.427 Y1.1 17.044,22.3 C1.1
NetC2_1: C2.1 MPU.7 Y1.2 | length 8.9
  Bottom Layer w0.254: C2.1 13.044,22.3 Y1.2 13.682,21.562 13.682,20.818 14.5,20 MPU.7
NetC4_1: C4.1 CAN_Trans.9 Y2.2 | length 10.3
  Top Layer w0.254: C4.1 11.25,14.656 11.794,15.201 11.794,16.138 14.349,18.693 15.286,18.693 CAN_Trans.9
NetC5_1: C5.1 CAN_Trans.8 Y2.1 | length 14
  Top Layer w0.254: Y2.1 7.25,14.656 C5.1 ; Y2.1@7.2,14.956 8.023,15.779 8.273,15.779 11.875,19.381 CAN_Trans.8
NetCAN_TR_2: CAN_TR.2 TermRes.2 | length 2.7
  Top Layer w0.254: CAN_TR.2 TermRes.2
NetCAN_Trans_18: CAN_Trans.18 R2.1 | length 4.6
  Top Layer w0.254: CAN_Trans.18 26.681,17.431 R2.1
"PWR IN": 5V.1 "CAN Con..01" | length 9.8
  Top Layer w0.381: 5.75,27.746 9.701,27.746 13.425,31.47 5V.1
RESET: "Serial Prog.1" ICSP.05 MPU.29 R1.1 RES.2 | length 79
  Top Layer w0.254: v1(4.75,17.375) 4.75,5.484 6.707,3.528 10.682,3.528 ICSP.05
  Bottom Layer w0.254: RES.2 5.65,35.6 6.75,34.5 9.25,34.5 11.17,32.58 ; MPU.29 5.122,14.4 4.75,14.772 v1(4.75,17.375) 6.03,18.655 6.03,18.971 6.912,19.852 6.912,20.498 7.5,21.087 7.5,29.217 10.863,32.58 11.17,32.58 ; R1.1 30.85,30.6 30.85,35.75 29.71,36.89 25.298,36.89 24.37,35.963 24.37,35.278 21.673,32.58 11.17,32.58
RXD: "Serial Prog.3" MPU.30 | length 35
  Bottom Layer w0.254: MPU.30 7.484,15.2 6.488,16.196 6.488,18.781 7.369,19.663 7.369,20.309 8.25,21.19 8.25,27.333 12.988,32.071 22.091,32.071 25.77,35.75
TXD: "Serial Prog.2" MPU.31 | length 36
  Bottom Layer w0.254: MPU.31 7.484,16 6.945,16.539 6.945,17.889 7.941,18.885 7.941,20.235 9.092,21.386 9.092,27.528 13.177,31.614 24.173,31.614 28.31,35.75
VCC: 3.3V.3 5V.3 "Serial Prog.4" C3.1 C6.1 C9.1 CAN_Trans.1 CAN_Trans.19 CAN_Trans.27 ICSP.02 LVL-1.19 LVL-2.19 MPU.4 MPU.6 MPU.18 MPU.20 R1.2 R2.2 | length 129.2
  Top Layer w0.254: ICSP.02 7.774,5 8.789,3.985 12.515,3.985 v1(14.25,2.25) ; 5V.3 14.575,36.03 14.923,35.682 14.923,35.03 17.774,32.179 C3.1 17.774,24.657 18.5,23.931 ; CAN_Trans.1 18.5,23.931 ; C9.1 18.264,5.726 ; v1(19,4.25) 18.264,4.986 18.264,5.726 ; CAN_Trans.19 24.181,18.081 25.1,19 ; CAN_Trans.27 22.137,23.319 21.199,23.319 20.818,23.7 20.818,23.931 ; v1(22.75,11) 22.75,7.987 21.061,6.298 20.473,6.298 LVL-2.19 18.763,6.225 18.264,5.726 ; 3.3V.3 26.05,32.95 v1(26.775,32.225) ; R2.2 25.1,19 ; 18.5,23.931 20.818,23.931 ; 20.818,23.931 20.818,24.162 21.145,24.489 23.205,24.489 25.1,22.594 25.1,19
  Top Layer w0.381: 5V.3@14.575,36.03 16.728,36.03 17.651,36.954 22.026,36.954 23.23,35.75 24.961,34.02 24.961,33.21 3.3V.3
  Bottom Layer w0.254: ICSP.02 7.774,5 8.789,3.985 12.171,3.985 13.035,4.849 13.035,6.42 13.215,6.6 13.215,8.666 12.9,8.981 MPU.20 12.9,10.516 13.439,11.055 13.961,11.055 ; MPU.4 12.1,17.484 12.639,16.945 13.161,16.945 MPU.6@13.7,17.484 ; MPU.6 MPU.6@13.7,17.484 ; v1(14.25,2.25) 17,2.25 v1(19,4.25) ; MPU.18 14.5,10.516 13.961,11.055 ; v1(22.75,11) 24.1,12.35 24.1,13.624 C6.1 24.476,21.036 23.811,21.702 26.344,24.235 26.344,27.469 29.25,30.375 R1.2 29.25,30.625 28.877,30.998 28.752,30.998 27.719,32.031 26.969,32.031 v1(26.775,32.225) ; MPU.6@13.7,17.484 13.7,15.39 14.465,14.625 14.465,11.559 13.961,11.055
pads on no net: "Serial Prog.5" CAN_Trans.2 CAN_Trans.6 CAN_Trans.7 CAN_Trans.11 CAN_Trans.12 CAN_Trans.22 CAN_Trans.23 CAN_Trans.25 LVL-2.5 LVL-2.6 LVL-2.7 LVL-2.8 LVL-2.9 LVL-2.12 LVL-2.13 LVL-2.14 LVL-2.15 LVL-2.16 RES.1 RES.3

## Polygon pours and split planes (outlines as drawn)
GND on Top Layer "GND_L01_P000" (solid, pour order 0): 38.5,38.25 0,38.25 0,0 38.5,0
GND on Bottom Layer "GND_L02_P001" (solid, pour order 1): 38.5,38.25 0,38.25 0,0 38.5,0

## Other copper
Top Layer:
  pour cut-out: 12.5,16.75 6,16.75 6,12.75 12.5,12.75
Bottom Layer:
  pour cut-out: 11.812,24.288 18.312,24.288 18.312,20.288 11.812,20.288

## Silkscreen, mask and mechanical layers (free items; w line width, h text height)
Bottom Overlay:
  text "CAN_IB_V1 / Panther Racing / Patrick Murphy" at 32.25,4 h1.52
Mechanical 1:
  lines w0.254: 0,34.75 cw(c3.5,34.75) 3.5,38.25 36,38.25 cw(c36,35.75) 38.5,35.75 38.5,2.5 cw(c36,2.5) 36,0 3.507,0 ; 0.007,34.75 0.007,3.503 ccw(c3.507,3.503) 3.507,0.003

## Text inside footprints (layer, text, board x,y; h text height)
ADC: Top Component Center "1" at 2.768,1.712 h1.97 r90; Top Component Center "6" at 2.768,19.563 h1.97 r90; Mechanical 40 "2.540" at 2.26,-3.351 h0.39 r90; Mechanical 40 "2.540" at 0.419,2.237 h0.39 r90; Mechanical 40 "15.240" at 6.515,10.352 h0.39 r90; Mechanical 40 "12.700" at -1.042,10.352 h0.39 r90; Top Overlay "1" at 2.768,1.712 h1.97 r90; Top Overlay "6" at 2.768,19.563 h1.97 r90
COMS: Mechanical 40 "30.480" at 32.825,20.59 h0.39 r90; Mechanical 40 "33.020" at 40.382,20.59 h0.39 r90; Mechanical 40 "2.540" at 34.286,37.595 h0.39 r90; Mechanical 40 "2.540" at 36.127,43.183 h0.39 r90; Bottom Component Center "1" at 36.75,37.5 h1.97 r90; Bottom Component Center "13" at 34,5.25 h1.97 r90; Bottom Overlay "1" at 36.75,37.5 h1.97 r90; Bottom Overlay "13" at 34,5.25 h1.97 r90
"Serial Prog": Mechanical 40 "2.540" at 39.003,35.623 h0.39; Mechanical 40 "2.540" at 33.415,37.464 h0.39; Mechanical 40 "15.240" at 25.3,31.368 h0.39; Mechanical 40 "12.700" at 25.3,38.925 h0.39; Bottom Component Center "1" at 33.94,35.115 h1.97; Bottom Component Center "6" at 16.089,35.115 h1.97; Bottom Overlay "1" at 33.94,35.115 h1.97; Bottom Overlay "6" at 16.089,35.115 h1.97